# Altium PCB PCB1.PcbDoc
Units mil, origin at the board's own origin, x right, y up, seen from the top; angles counter-clockwise.
Board outline 4980 x 3980.03 mil, 2 copper layers (Top Layer, Bottom Layer); 30 components, 34 nets, 194 pads, 4 vias.
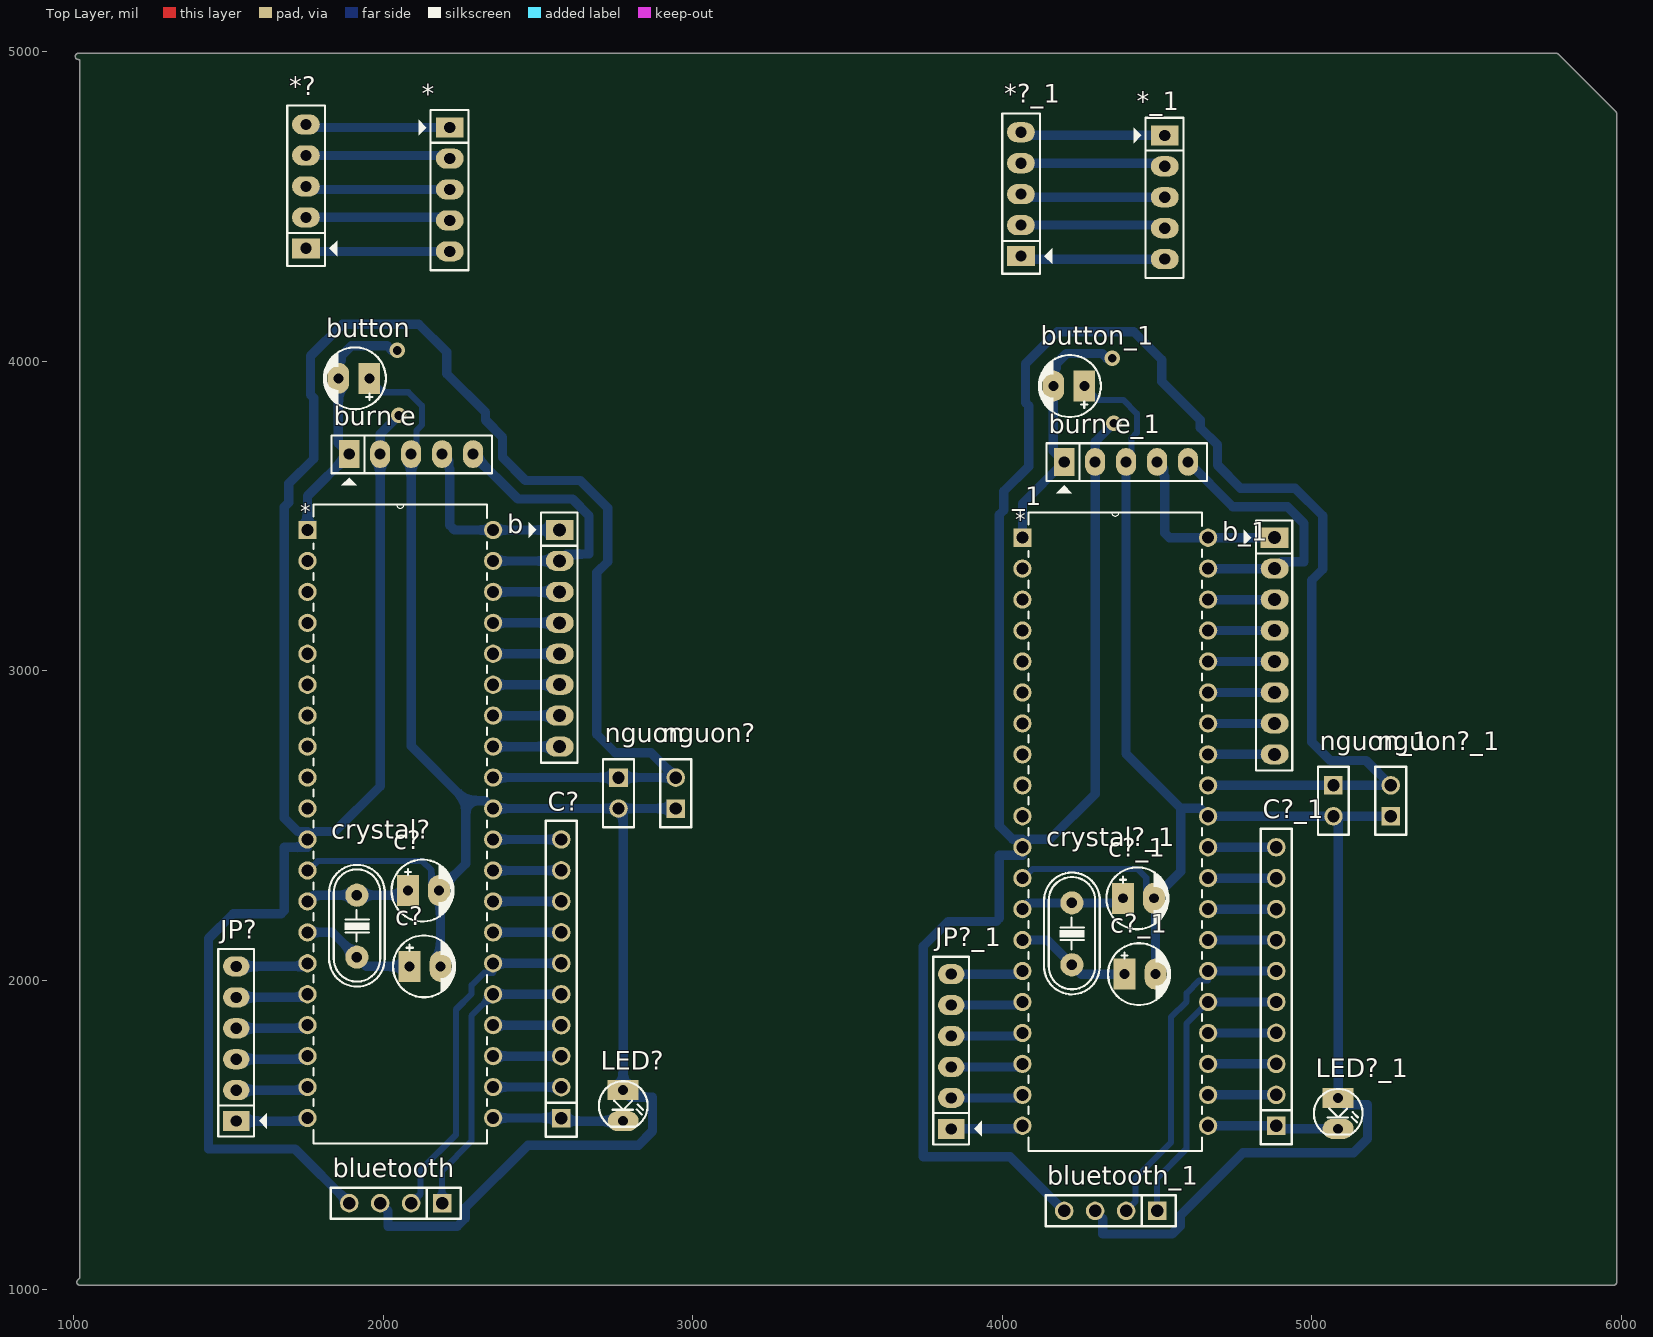
[diagram p0: Top Layer view]
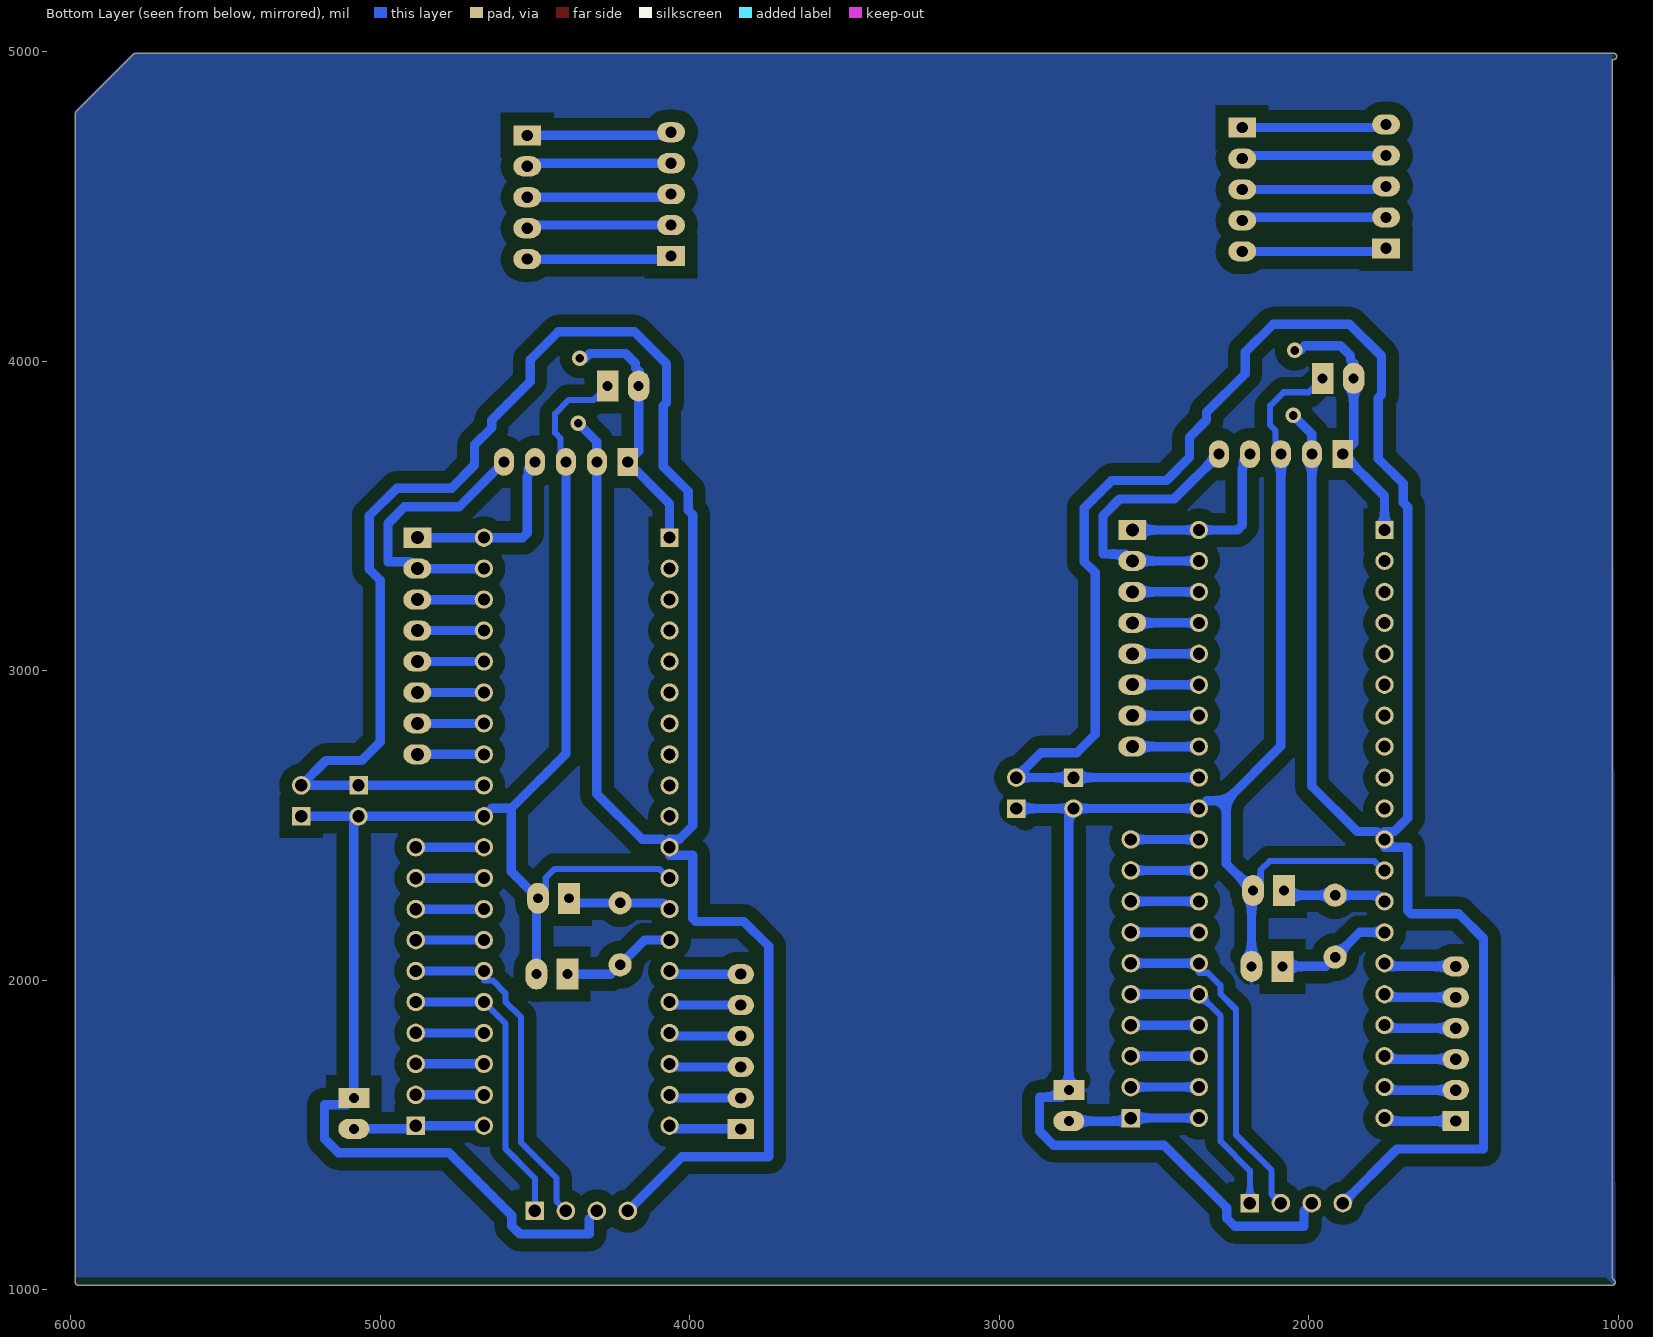
[diagram p1: Bottom Layer view, seen from below]
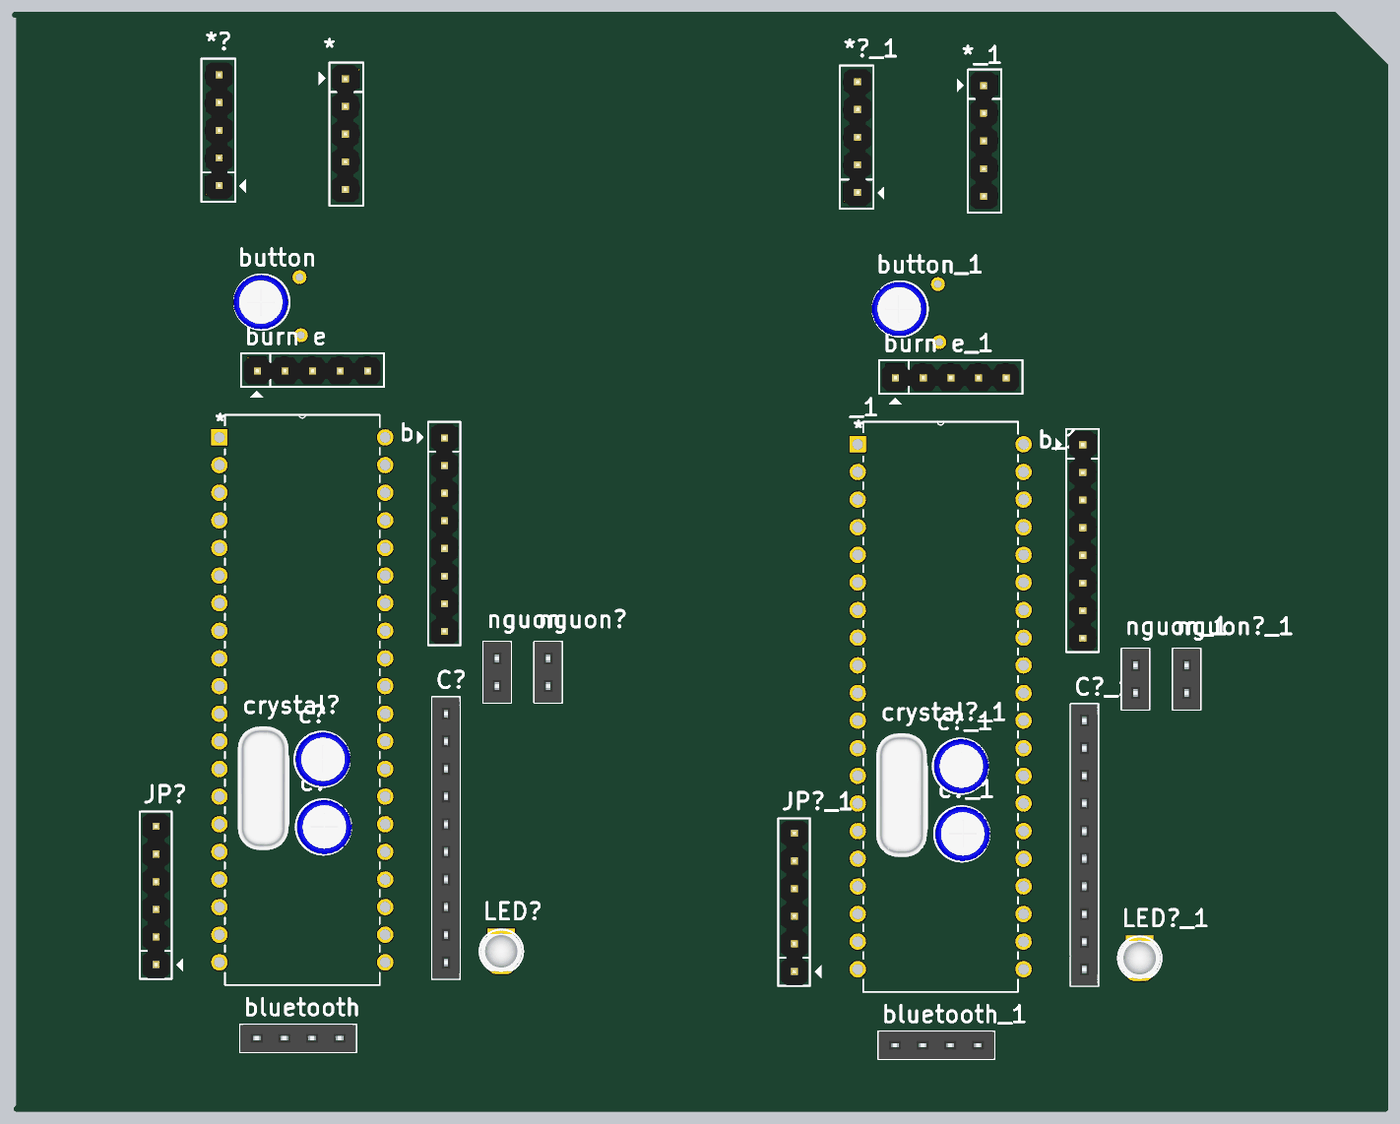
[diagram p2: 3D render of the assembled board from above, using the file's embedded part models]

## Layer stack, top to bottom
Top Solder: solder mask 0.4, Solder Resist, Dk 3.5
Top Layer: signal copper 1.4
Dielectric 1: dielectric 12.6, FR-4, Dk 4.8
Bottom Layer: signal copper 1.4
Bottom Solder: solder mask 0.4, Solder Resist, Dk 3.5

## Board outline
1019.99,1039.15 1019.99,4974.98 1015,4974.98 cw(c1015,4985) 1015,4995.02 5790,4995.02 cw(c5790,4985) 5797.08,4992.08 5982.08,4807.08 cw(c5975,4800) 5985.02,4800 5985.02,1025 cw(c5975,1025) 5975,1014.99 1020,1014.99 cw(c1020,1025) 1012.92,1032.08

## Design rules (kind name [scope] priority, off if disabled: settings)
Clearance [All] p1: gap=40 ignorepadtopadclearanceinfootprint=FALSE
PolygonConnect [All] p1: connectstyle=Relief reliefconductorwidth=10 reliefentries=4 polygonreliefangle="90 Angle" airgapwidth=10
RoomDefinition Sheet1 [InComponentClass('Sheet1')] p1: confinementstyle=ConfineIn formatcopy=TRUE lockcomponents=FALSE outline 865,5525 5460,5525 5460,7630 865,7630
RoutingLayers [All] p1: top layer_v5=FALSE bottom layer_v5=TRUE
RoutingVias [All] p1: holewidth=30 width=80 viastyle="Through Hole" minholewidth=30 minwidth=80 maxholewidth=30 maxwidth=80
SolderMaskExpansion [All] p1: expansion=4
Width [All] p1: maxlimit=30 minlimit=20 preferedwidth=30
29 further rules are at their usual default settings.

## Classes and differential pairs
component class Sheet1: * *? b bluetooth "burn e" button c1 c2 c? C? crystal? JP? LED? nguon nguon? U? ""

## Components (designator, comment, footprint, x,y, rotation, side; value= is the part's Value field where it differs from the comment)
* "JP5" JP5 2215,4755 r270 top
*? "JP5" JP5 1750,4365 r90 top
*?_1 "JP5" JP5 4060,4340 r90 top (schematic designator *?)
*_1 "JP5" JP5 4525,4730 r270 top (schematic designator *)
_1 "PIC16F877A-I/P" DIP254P1524X483-40 4665,1530 r0 top
b "JP8 PIN" JP8 2570,3455 r270 top value=JP7
b_1 "JP8 PIN" JP8 4880,3430 r270 top value=JP7 (schematic designator b)
bluetooth "JP4" JP4-C1T 2190,1280 r180 top
bluetooth_1 "JP4" JP4-C1T 4500,1255 r180 top (schematic designator bluetooth)
"burn e" "JP5" JP5 1890,3700 r0 top
"burn e_1" "JP5" JP5 4200,3675 r0 top (schematic designator "burn e")
button "10uF" CP1/2 1955,3945 r180 top value=10uF/50V
button_1 "10uF" CP1/2 4265,3920 r180 top value=10uF/50V (schematic designator button)
C? "JP10" JP10-C1T 2575,1555 r90 top
c? "10uF" CP1/2 2085,2045 r0 top value=10uF/50V
c? "10uF" CP1/2 2080,2290 r0 top value=10uF/50V
c?_1 "10uF" CP1/2 4390,2265 r0 top value=10uF/50V (schematic designator c?)
c?_1 "10uF" CP1/2 4395,2020 r0 top value=10uF/50V (schematic designator c?)
C?_1 "JP10" JP10-C1T 4885,1530 r90 top (schematic designator C?)
crystal? "4Mhz" XT2 1915,2175 r270 top
crystal?_1 "4Mhz" XT2 4225,2150 r270 top (schematic designator crystal?)
JP? "JP6 PIN" JP6 1525,1545 r90 top value=JP7
JP?_1 "JP6 PIN" JP6 3835,1520 r90 top value=JP7 (schematic designator JP?)
LED? "LED" LED-3 2775,1645 r270 top value="LED 3 ly Single Colour"
LED?_1 "LED" LED-3 5085,1620 r270 top value="LED 3 ly Single Colour" (schematic designator LED?)
nguon "JP2" JP2-C1T 2760,2655 r270 top
nguon? "JP2" JP2-C1T 2945,2555 r90 top
nguon?_1 "JP2" JP2-C1T 5255,2530 r90 top (schematic designator nguon?)
nguon_1 "JP2" JP2-C1T 5070,2630 r270 top (schematic designator nguon)
? "PIC16F877A-I/P" DIP254P1524X483-40 2355,1555 r0 top

## Footprints (in the part's own frame and the unit in brackets; to place one, negate y for a bottom-side part, rotate by r counter-clockwise, add the part's x,y. Pads: shape width x height; smd on the part's side, far side on the other; paste and mask are expansions set on the pad)
CP1/2 [mil] "Tu hoa < 22uF/16>50V"
  rect 70x100 hole 32: 1(0,0)
  oval 70x100 hole 32: 2(100,0)
  silkscreen extent -53,-100 147,100, body extent -49,-99 149,99, height 287
DIP254P1524X483-40 [mil]
  rect 59x59 hole 39: 1(-600,1900)
  round 59 hole 39: 2(-600,1800) 3(-600,1700) 4(-600,1600) 5(-600,1500) 6(-600,1400) 7(-600,1300) 8(-600,1200) 9(-600,1100) 10(-600,1000) 11(-600,900) 12(-600,800) 13(-600,700) 14(-600,600) 15(-600,500) 16(-600,400) 17(-600,300) 18(-600,200) 19(-600,100) 20(-600,0) 21(0,0) 22(0,100) 23(0,200) 24(0,300) 25(0,400) 26(0,500) 27(0,600) 28(0,700) 29(0,800) 30(0,900) 31(0,1000) 32(0,1100) 33(0,1200) 34(0,1300) 35(0,1400) 36(0,1500) 37(0,1600) 38(0,1700) 39(0,1800) 40(0,1900)
  silkscreen extent -580,-82 -20,1982
JP2-C1T [mm] "2 row, straight, gold plating"
  rect 1.52x1.52 hole 1.02: 1(0,0)
  round 1.52 hole 1.02: 2(2.54,0)
  silkscreen extent -1.52,-1.27 4.06,1.27, body extent -1.52,-1.25 4.06,1.25, height 8.51
JP4-C1T [mm] "4 row, straight, gold plating"
  rect 1.52x1.52 hole 1.02: 1(0,0)
  round 1.52 hole 1.02: 2(2.54,0) 3(5.08,0) 4(7.62,0)
  silkscreen extent -1.52,-1.27 9.14,1.27, body extent -1.52,-1.25 9.14,1.25, height 8.51
JP5 [mil] "JP5"
  rect 65x90 hole 36: 1(0,0)
  oval 65x90 hole 36: 2(100,0) 3(200,0) 4(300,0) 5(400,0)
  silkscreen extent -57,-101 461,60, body extent -48,-53 448,45, height 323
JP6 [mil] "JP6"
  rect 65x85 hole 36: 1(0,0)
  oval 65x85 hole 36: 2(100,0) 3(200,0) 4(300,0) 5(400,0) 6(500,0)
  silkscreen extent -50,-99 556,58, body extent -48,-50 548,48, height 323
JP8 [mil] "JP8"
  rect 65x90 hole 42: 1(0,0)
  oval 65x90 hole 42: 2(100,0) 3(200,0) 4(300,0) 5(400,0) 6(500,0) 7(600,0) 8(700,0)
  silkscreen extent -56,-100 752,57, body extent -48,-50 748,48, height 323
JP10-C1T [mm] "10 row, straight, gold plating"
  rect 1.52x1.52 hole 1.02: 1(0,0)
  round 1.52 hole 1.02: 2(2.54,0) 3(5.08,0) 4(7.62,0) 5(10.16,0) 6(12.7,0) 7(15.24,0) 8(17.78,0) 9(20.32,0) 10(22.86,0)
  silkscreen extent -1.52,-1.27 24.38,1.27, body extent -1.52,-1.25 24.38,1.25, height 8.51
LED-3 [mil] "LED 2 PIN, 3ly Only colour"
  rect 65x100 hole 32: 1(0,0)
  oval 65x100 hole 32: 2(100,0)
  silkscreen extent -29,-78 118,79, body extent -13,-75 125,75, height 217
XT2 [mil] "Footpin for Crystal 2 pin"
  round 75 hole 34: 1(-100,0) 2(100,0)
  silkscreen extent -198,-90 195,90, body extent -233,-93 213,90, height 138

## Part data
_1 ?: "PIC PIC® 16F Microcontroller IC 8-Bit 20MHz 14KB _8K x 14_ FLASH 40-PDIP", Package="DIP-40 Microchip", Availability=Unavailable, MF=Microchip, MP=PIC16F877A-I/P, Price=None, SnapEDA_Link=https://www.snapeda.com/parts/PIC16F877A-I/P/Microchip/view-part/1877145/?ref=snap
b b_1: library part JP8
bluetooth bluetooth_1: "WR-PHD 2.54 mm Angled Socket Header", Manufacturer="Würth Elektronik eiSos GmbH", partNo=613004143121, ComponentLink1 Description=Manufacturer, ComponentLink1URL=http://www.we-online.com, ComponentLink2 Description=Datasheet, ComponentLink2URL=http://katalog.we-online.de/em/datasheet/6130xx143121.pdf, Created by="Karrer Zheng", Created Date="29 March 2013", NoPins=04
button button_1 c? c? c?_1 c?_1: library part CP1, "Cap P  0,1uF < 22uF , 16 - 50V", Description 1="10 => 220uF/6,3V/10V - 10uF => 100uF/16V", Description 2="0,1uF => 33uF/50V - 10uF => 22uF/63V", Description 3="0,47uF => 10uF/100V"
C? C?_1: "WR-PHD 2.54 mm Angled Socket Header", Manufacturer="Würth Elektronik eiSos GmbH", partNo=613010143121, ComponentLink1 Description=Manufacturer, ComponentLink1URL=http://www.we-online.com, ComponentLink2 Description=Datasheet, ComponentLink2URL=http://katalog.we-online.de/em/datasheet/6130xx143121.pdf, Created by="Karrer Zheng", Created Date="29 March 2013", NoPins=10
crystal? crystal?_1: library part XT2, "Crystal For all Crystal 2pin."
JP? JP?_1: library part JP6
LED? LED?_1: "LED Single colour Green and Red"
nguon nguon? nguon?_1 nguon_1: "WR-PHD 2.54 mm Angled Socket Header", Manufacturer="Würth Elektronik eiSos GmbH", partNo=613002143121, ComponentLink1 Description=Manufacturer, ComponentLink1URL=http://www.we-online.com, ComponentLink2 Description=Datasheet, ComponentLink2URL=http://katalog.we-online.de/em/datasheet/6130xx143121.pdf, Created by="Karrer Zheng", Created Date="29 March 2013", NoPins=02

## Via types
v1: diameter 50, hole 28, Top Layer to Bottom Layer, 4 vias

## Nets (pads, with @x,y where several pads share a name; then routed paths per layer and width w, separated by ;. In a path a pad name is that pad's centre, name@x,y a point inside that pad or via, vN(x,y) a via of type N, cw(c..) or ccw(c..) an arc to the next point about the centre after c; other vN are vias at no path point)
GND: "burn e.3" ?.12 ?.31 bluetooth.3 button.1 c?.2 LED?.1 nguon.2 nguon?.1 | length 5572.3
  Bottom Layer w20: ?.12@1770,2370 ?.12 1758.28,2355 1788.28,2385 2126.57,2385 2155,2356.57 2155,2315 c?.2@2180,2290 ; button.1 2000,3900 2081.07,3900 2125,3856.07 2125,3793.93 2107.5,3776.43 2107.5,3717.5 2090,3700
  Bottom Layer w30: bluetooth.3 2015,1255 2015,1205.08 2238.56,1205.08 2264.92,1231.44 2264.92,1264.92 2467.5,1467.5 2824.6,1467.5 2870,1512.9 2870,1622.5 2797.5,1622.5 LED?.1 2775,2540 nguon.2 ; 2090,3700 2090,2757.07 2266.57,2580.5 ; c?.2@2185,2045 2185,2285 2180,2290 2266.57,2376.57 2266.57,2580.5 ; nguon?.1 nguon.2 ; 2266.57,2580.5 2329.5,2580.5 ?.31 nguon.2
Net*_1: *.1 *?.5 | length 469.1
  Bottom Layer w30: *?.5 1760,4755 *.1
Net*_2: *.2 *?.4 | length 469.1
  Bottom Layer w30: *?.4 2205,4665 *.2
Net*_3: *.3 *?.3 | length 469.1
  Bottom Layer w30: *?.3 1760,4555 *.3
Net*_4: *.4 *?.2 | length 469.1
  Bottom Layer w30: *?.2 2205,4465 *.4
Net*_5: *.5 *?.1 | length 469.1
  Bottom Layer w30: *?.1 1760,4355 *.5
Net_1: "burn e.1" ?.1 button.2 | length 790.9
  Bottom Layer w30: ?.1 1755,3565 1890,3700 1855,3735 button.2 ; button.2@1853.36,3991.64 1865,4003.28 1865,4017.78 1897.22,4050 2012.78,4050 2027.78,4035 v1(2045,4035)
Net_13: ?.13 c?.1@2080,2290 crystal?.1 | length 339.5
  Bottom Layer w30: ?.13 1775,2275 crystal?.1 2065,2275 c?.1@2080,2290
Net_14: ?.14 c?.1@2085,2045 crystal?.2 | length 375.6
  Bottom Layer w30: ?.14 1835,2155 crystal?.2 1945,2045 c?.1@2085,2045
Net_15: ?.15 JP?.6 | length 234.1
  Bottom Layer w30: JP?.6 1745,2045 ?.15
Net_16: ?.16 JP?.5 | length 234.1
  Bottom Layer w30: JP?.5 1745,1945 ?.16
Net_17: ?.17 JP?.4 | length 234.1
  Bottom Layer w30: JP?.4 1745,1845 ?.17
Net_18: ?.18 JP?.3 | length 234.1
  Bottom Layer w30: JP?.3 1745,1745 ?.18
Net_19: ?.19 JP?.2 | length 234.1
  Bottom Layer w30: JP?.2 1745,1645 ?.19
Net_20: ?.20 JP?.1 | length 234.1
  Bottom Layer w30: JP?.1 1745,1545 ?.20
Net_21: ?.21 C?.1 LED?.2 | length 424.1
  Bottom Layer w30: ?.21 C?.1 2585,1545 LED?.2
Net_22: ?.22 C?.2 | length 220
  Bottom Layer w30: ?.22 C?.2
Net_23: ?.23 C?.3 | length 220
  Bottom Layer w30: ?.23 C?.3
Net_24: ?.24 C?.4 | length 220
  Bottom Layer w30: ?.24 C?.4
Net_25: ?.25 bluetooth.1 C?.5 | length 963.3
  Bottom Layer w20: bluetooth.1 2190,1385 2285,1480 2285,1885 ?.25
  Bottom Layer w30: ?.25 C?.5
Net_26: ?.26 bluetooth.2 C?.6 | length 1121.6
  Bottom Layer w20: bluetooth.2 2120.08,1310.08 2120.08,1385.79 2235,1500.71 2235,1905.71 2285.5,1956.21 2285.5,1983.79 2326.21,2024.5 2355,2024.5 ?.26
  Bottom Layer w30: ?.26 C?.6
Net_27: ?.27 C?.7 | length 220
  Bottom Layer w30: ?.27 C?.7
Net_28: ?.28 C?.8 | length 220
  Bottom Layer w30: ?.28 C?.8
Net_29: ?.29 C?.9 | length 220
  Bottom Layer w30: ?.29 C?.9
Net_30: ?.30 C?.10 | length 220
  Bottom Layer w30: ?.30 C?.10
Net_33: ?.33 b.8 | length 215
  Bottom Layer w30: ?.33 b.8
Net_34: ?.34 b.7 | length 215
  Bottom Layer w30: ?.34 b.7
Net_35: ?.35 b.6 | length 215
  Bottom Layer w30: ?.35 b.6
Net_36: ?.36 b.5 | length 215
  Bottom Layer w30: ?.36 b.5
Net_37: ?.37 b.4 | length 215
  Bottom Layer w30: ?.37 b.4
Net_38: ?.38 b.3 | length 215
  Bottom Layer w30: ?.38 b.3
Net_39: "burn e.5" ?.39 b.2 | length 900.3
  Bottom Layer w30: 2290,3700 2435,3555 2611.14,3555 2665,3501.14 2665,3377.5 2592.5,3377.5 b.2 ?.39
Net_40: "burn e.4" ?.40 b.1 | length 603
  Bottom Layer w30: 2190,3700 2212.5,3677.5 2212.5,3652.9 2215,3652.9 2215,3470 2230,3455 ?.40 b.1
VCC: "burn e.2" ?.11 ?.32 bluetooth.4 nguon.1 nguon?.2 | length 7968.9
  Bottom Layer w30: bluetooth.4 1715,1455 1435,1455 1435,2135 1515,2215 1670,2215 1680.5,2225.5 1680.5,2429.5 1755,2429.5 ?.11 ; v1(2050,3825) 1990,3765 1990,3700 1990,2627.07 1843.43,2480.5 1780.5,2480.5 ?.11 ; ?.32 nguon.1 nguon?.2 2865,2735 2749.71,2735 2689.85,2794.85 2689.85,3317.5 2725,3352.65 2725,3525.99 2635.99,3615 2459.85,3615 2385,3689.85 2385,3755 2330,3810 2330,3835 2205,3960 2205,4030 2115,4120 1868.22,4120 1765,4016.78 1765,3891.5 1775,3881.5 1775,3685 1695,3605 1695,3544 1680.5,3529.5 1680.5,2524.14 1724.14,2480.5 1755,2480.5 ?.11
pads on no net: "burn e_1.1" "burn e_1.2" "burn e_1.3" "burn e_1.4" "burn e_1.5" *?_1.1 *?_1.2 *?_1.3 *?_1.4 *?_1.5 *_1.1 *_1.2 *_1.3 *_1.4 *_1.5 ?.2 ?.3 ?.4 ?.5 ?.6 ?.7 ?.8 ?.9 ?.10 _1.1 _1.2 _1.3 _1.4 _1.5 _1.6 _1.7 _1.8 _1.9 _1.10 _1.11 _1.12 _1.13 _1.14 _1.15 _1.16 _1.17 _1.18 _1.19 _1.20 _1.21 _1.22 _1.23 _1.24 _1.25 _1.26 _1.27 _1.28 _1.29 _1.30 _1.31 _1.32 _1.33 _1.34 _1.35 _1.36 _1.37 _1.38 _1.39 _1.40 b_1.1 b_1.2 b_1.3 b_1.4 b_1.5 b_1.6 b_1.7 b_1.8 bluetooth_1.1 bluetooth_1.2 bluetooth_1.3 bluetooth_1.4 button_1.1 button_1.2 C?_1.1 c?_1.1 C?_1.2 c?_1.2 C?_1.3 C?_1.4 C?_1.5 C?_1.6 C?_1.7 C?_1.8 C?_1.9 C?_1.10 crystal?_1.1 crystal?_1.2 JP?_1.1 JP?_1.2 JP?_1.3 JP?_1.4 JP?_1.5 JP?_1.6 LED?_1.1 LED?_1.2 nguon?_1.1 nguon?_1.2 nguon_1.1 nguon_1.2
copper on no net: | length 25640.3
  Bottom Layer w20: 4080,2345 4065,2330 4068.28,2330 4098.28,2360 4436.57,2360 4465,2331.57 4465,2290 4490,2265 ; 4265,3920 4310,3875 4391.07,3875 4435,3831.07 4435,3768.93 4417.5,3751.43 4417.5,3692.5 4400,3675 ; 4400,1255 4430.08,1285.08 4430.08,1360.79 4545,1475.71 4545,1880.71 4595.5,1931.21 4595.5,1958.79 4636.21,1999.5 4665,1999.5 4665,2030 ; 4500,1255 4500,1360 4595,1455 4595,1860 4665,1930
  Bottom Layer w30: 3835,1520 4055,1520 4065,1530 ; 3835,1620 4055,1620 4065,1630 ; 3835,1720 4055,1720 4065,1730 ; 3835,1820 4055,1820 4065,1830 ; 3835,1920 4055,1920 4065,1930 ; 3835,2020 4055,2020 4065,2030 ; 4060,4340 4070,4330 4525,4330 ; 4060,4440 4515,4440 4525,4430 ; 4060,4540 4070,4530 4525,4530 ; 4060,4640 4515,4640 4525,4630 ; 4060,4740 4070,4730 4525,4730 ; 4065,2130 4145,2130 4225,2050 4255,2020 4395,2020 ; 4065,2230 4085,2250 4225,2250 4375,2250 4390,2265 ; 4065,3430 4065,3540 4200,3675 4165,3710 4165,3920 ; 4163.36,3966.64 4175,3978.28 4175,3992.78 4207.22,4025 4322.78,4025 4337.78,4010 v1(4355,4010) ; 4200,1255 4025,1430 3745,1430 3745,2110 3825,2190 3980,2190 3990.5,2200.5 3990.5,2404.5 4065,2404.5 4065,2430 ; 4300,1255 4325,1230 4325,1180.08 4548.56,1180.08 4574.92,1206.44 4574.92,1239.92 4777.5,1442.5 5134.6,1442.5 5180,1487.9 5180,1597.5 5107.5,1597.5 5085,1620 5085,2515 5070,2530 ; v1(4360,3800) 4300,3740 4300,3675 4300,2602.07 4153.43,2455.5 4090.5,2455.5 4065,2430 ; 4400,3675 4400,2732.07 4576.57,2555.5 ; 4495,2020 4495,2260 4490,2265 4576.57,2351.57 4576.57,2555.5 ; 4500,3675 4522.5,3652.5 4522.5,3627.9 4525,3627.9 4525,3445 4540,3430 4665,3430 4880,3430 ; 4600,3675 4745,3530 4921.14,3530 4975,3476.14 4975,3352.5 4902.5,3352.5 4880,3330 4665,3330 ; 4665,1530 4885,1530 4895,1520 5085,1520 ; 4665,1630 4885,1630 ; 4665,1730 4885,1730 ; 4665,1830 4885,1830 ; 4665,1930 4885,1930 ; 4665,2030 4885,2030 ; 4665,2130 4885,2130 ; 4665,2230 4885,2230 ; 4665,2330 4885,2330 ; 4665,2430 4885,2430 ; 4665,2630 5070,2630 5255,2630 5175,2710 5059.71,2710 4999.85,2769.85 4999.85,3292.5 5035,3327.65 5035,3500.99 4945.99,3590 4769.85,3590 4695,3664.85 4695,3730 4640,3785 4640,3810 4515,3935 4515,4005 4425,4095 4178.22,4095 4075,3991.78 4075,3866.5 4085,3856.5 4085,3660 4005,3580 4005,3519 3990.5,3504.5 3990.5,2499.14 4034.14,2455.5 4065,2455.5 4065,2430 ; 4665,2730 4880,2730 ; 4665,2830 4880,2830 ; 4665,2930 4880,2930 ; 4665,3030 4880,3030 ; 4665,3130 4880,3130 ; 4665,3230 4880,3230 ; 5255,2530 5070,2530 ; 4576.57,2555.5 4639.5,2555.5 4665,2530 5070,2530

## Polygon pours and split planes (outlines as drawn)
no net on Top Solder (solid): 5330,2125
no net on Top Solder (solid): 5380,2105
no net on Top Solder (solid): 5520,2120
no net on Top Solder (solid): 3020,2150
GND on Bottom Layer (solid, pour order 20): 1020,4995 5800,4995 5985,4810 5985,1040 1040,1040 1010,1010
no net on Bottom Layer "Bottom Layer-GND 2" (hatched Horizontal grid 30 track 15, pour order 18): 4750,4135
GND on Bottom Layer "Bottom Layer-GND 1" (hatched Horizontal grid 30 track 15, pour order 2): 1020,4995
GND on Bottom Layer "Bottom Layer-GND 2" (hatched Horizontal grid 30 track 15, pour order 0): 2440,4160

## Text inside footprints (layer, text, board x,y; h text height)
_1: Top Overlay "*" at 4042,3464 h50; Mechanical 13 "*" at 4042,3464 h50
?: Top Overlay "*" at 1732,3489 h50; Mechanical 13 "*" at 1732,3489 h50